# Altium PCB VisitCardPCB.PcbDoc (part 3 of 3)
Units mm, origin at the board's own origin, x right, y up, seen from the top; angles counter-clockwise.
Board outline 85 x 55 mm, 2 copper layers (Top, Bottom); 50 components, 47 nets, 148 pads, 42 vias.
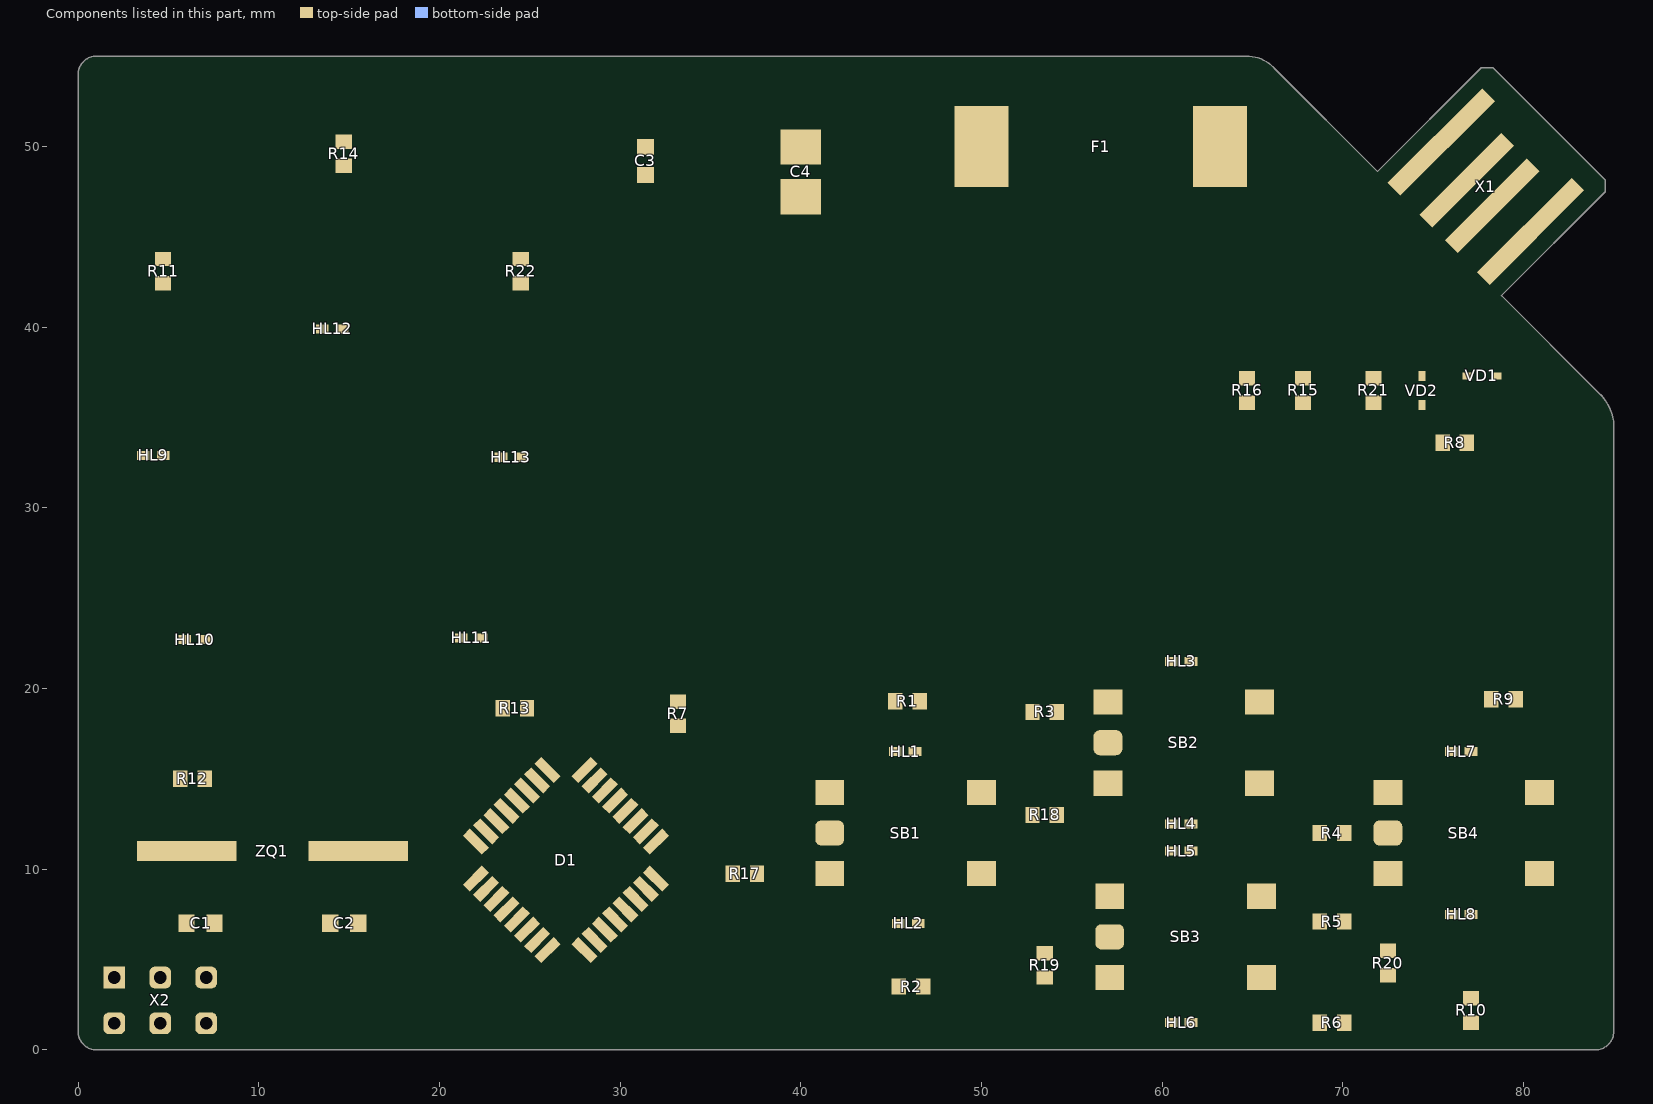
[diagram p3: the components of this part, seen from the top]

## Via types
v1: diameter 1, hole 0.5, Top to Bottom, 41 vias
v2: diameter 3.5/3.5 (per signal layer), hole 2.5, Top to Bottom, 1 vias

## Nets (pads, with @x,y where several pads share a name; then routed paths per layer and width w, separated by ;. In a path a pad name is that pad's centre, name@x,y a point inside that pad or via, vN(x,y) a via of type N, cw(c..) or ccw(c..) an arc to the next point about the centre after c; other vN are vias at no path point) (continued)
copper on no net: (continued)
  Top w0.025: 74.449,31.017 78.081,31.017 ; 74.474,23.092 76.024,23.092 ; 74.474,31.043 78.081,31.043 ; 74.474,31.068 78.081,31.068 ; 74.5,31.093 78.081,31.093 ; 74.5,31.119 78.081,31.119 ; 74.525,23.067 75.998,23.067 ; 74.525,31.144 78.081,31.144 ; 74.525,31.17 78.081,31.17 ; 74.551,31.195 78.081,31.195 ; 74.551,31.22 78.081,31.22 ; 74.576,23.042 75.948,23.042 ; 74.576,31.246 78.081,31.246 ; 74.576,31.271 78.081,31.271 ; 74.601,31.297 78.081,31.297 ; 74.627,31.322 78.081,31.322 ; 74.627,31.347 78.081,31.347 ; 74.652,31.373 78.081,31.373 ; 74.678,23.016 75.846,23.016 ; 74.678,31.398 78.081,31.398 ; 74.703,31.424 78.081,31.424 ; 74.703,31.449 78.081,31.449 ; 74.728,31.474 78.081,31.474 ; 74.754,31.5 78.081,31.5 ; 74.779,31.525 78.081,31.525 ; 74.805,31.551 78.081,31.551 ; 74.83,31.576 78.081,31.576 ; 74.855,31.601 78.081,31.601 ; 74.881,31.627 78.081,31.627 ; 74.906,31.652 78.081,31.652 ; 74.932,31.678 78.081,31.678 ; 74.957,31.703 78.081,31.703 ; 75.008,31.728 78.081,31.728 ; 75.033,31.754 78.081,31.754 ; 75.059,31.779 78.081,31.779 ; 75.109,31.805 78.056,31.805 ; 75.16,31.83 78.056,31.83 ; 75.186,31.855 78.056,31.855 ; 75.236,31.881 78.03,31.881 ; 75.287,31.906 78.03,31.906 ; 75.338,31.932 78.005,31.932 ; 75.414,31.957 77.98,31.957 ; 75.49,31.982 77.954,31.982 ; 75.567,32.008 77.903,32.008 ; 75.694,32.033 77.853,32.033 ; 75.871,32.059 77.751,32.059 ; 78.996,24.566 82.196,24.566 ; 78.996,24.591 82.196,24.591 ; 78.996,24.616 82.171,24.616 ; 78.996,24.642 82.171,24.642 ; 78.996,24.667 82.145,24.667 ; 78.996,24.693 82.145,24.693 ; 78.996,24.718 82.12,24.718 ; 78.996,24.743 82.094,24.743 ; 78.996,24.769 82.069,24.769 ; 78.996,24.794 82.018,24.794 ; 78.996,24.82 81.967,24.82 ; 78.996,24.845 81.84,24.845 ; 78.996,24.87 80.824,24.87 ; 78.996,24.896 80.824,24.896 ; 78.996,24.921 80.824,24.921 ; 78.996,24.947 80.824,24.947 ; 78.996,24.972 80.824,24.972 ; 78.996,24.997 80.824,24.997 ; 78.996,25.023 80.824,25.023 ; 78.996,25.048 80.824,25.048 ; 78.996,25.074 80.824,25.074 ; 78.996,25.099 80.824,25.099 ; 78.996,25.124 80.824,25.124 ; 78.996,25.15 80.824,25.15 ; 78.996,25.175 80.824,25.175 ; 78.996,25.201 80.824,25.201 ; 78.996,25.226 80.824,25.226 ; 78.996,25.251 80.824,25.251 ; 78.996,25.277 80.824,25.277 ; 78.996,25.302 80.824,25.302 ; 78.996,25.328 80.824,25.328 ; 78.996,25.353 80.824,25.353 ; 78.996,25.378 80.824,25.378 ; 78.996,25.404 80.824,25.404 ; 78.996,25.429 80.824,25.429 ; 78.996,25.455 80.824,25.455 ; 78.996,25.48 80.824,25.48 ; 78.996,25.505 80.824,25.505 ; 78.996,25.531 80.824,25.531 ; 78.996,25.556 80.824,25.556 ; 78.996,25.582 80.824,25.582 ; 78.996,25.607 80.824,25.607 ; 78.996,25.632 80.824,25.632 ; 78.996,25.658 80.824,25.658 ; 78.996,25.683 80.824,25.683 ; 78.996,25.709 80.824,25.709 ; 78.996,25.734 80.824,25.734 ; 78.996,25.759 80.824,25.759 ; 78.996,25.785 80.824,25.785 ; 78.996,25.81 80.824,25.81 ; 78.996,25.836 80.824,25.836 ; 78.996,25.861 80.824,25.861 ; 78.996,25.886 80.824,25.886 ; 78.996,25.912 80.824,25.912 ; 78.996,25.937 80.824,25.937 ; 78.996,25.963 80.824,25.963 ; 78.996,25.988 80.824,25.988 ; 78.996,26.013 80.824,26.013 ; 78.996,26.039 80.824,26.039 ; 78.996,26.064 80.824,26.064 ; 78.996,26.09 80.824,26.09 ; 78.996,26.115 80.824,26.115 ; 78.996,26.14 80.824,26.14 ; 78.996,26.166 80.824,26.166 ; 78.996,26.191 80.824,26.191 ; 78.996,26.217 80.824,26.217 ; 78.996,26.242 80.824,26.242 ; 78.996,26.267 80.824,26.267 ; 78.996,26.293 80.824,26.293 ; 78.996,26.318 80.824,26.318 ; 78.996,26.344 80.824,26.344 ; 78.996,26.369 80.824,26.369 ; 78.996,26.394 80.824,26.394 ; 78.996,26.42 80.824,26.42 ; 78.996,26.445 80.824,26.445 ; 78.996,26.471 80.824,26.471 ; 78.996,26.496 80.824,26.496 ; 78.996,26.521 80.824,26.521 ; 78.996,26.547 80.824,26.547 ; 78.996,26.572 80.824,26.572 ; 78.996,26.598 80.824,26.598 ; 78.996,26.623 80.824,26.623 ; 78.996,26.648 80.824,26.648 ; 78.996,26.674 80.824,26.674 ; 78.996,26.699 80.824,26.699 ; 78.996,26.725 80.824,26.725 ; 78.996,26.75 80.824,26.75 ; 78.996,26.775 80.824,26.775 ; 78.996,26.801 80.824,26.801 ; 78.996,26.826 80.824,26.826 ; 78.996,26.852 80.824,26.852 ; 78.996,26.877 80.824,26.877 ; 78.996,26.902 80.824,26.902 ; 78.996,26.928 80.824,26.928 ; 78.996,26.953 80.824,26.953 ; 78.996,26.979 80.824,26.979 ; 78.996,27.004 80.824,27.004 ; 78.996,27.029 80.824,27.029 ; 78.996,27.055 80.824,27.055 ; 78.996,27.08 80.824,27.08 ; 78.996,27.106 80.824,27.106 ; 78.996,27.131 80.824,27.131 ; 78.996,27.156 81.764,27.156 ; 78.996,27.182 81.84,27.182 ; 78.996,27.207 81.866,27.207 ; 78.996,27.233 81.917,27.233 ; 78.996,27.258 81.942,27.258 ; 78.996,27.283 81.967,27.283 ; 78.996,27.309 81.967,27.309 ; 78.996,27.334 81.993,27.334 ; 78.996,27.36 82.018,27.36 ; 78.996,27.385 82.018,27.385 ; 78.996,27.41 82.018,27.41 ; 78.996,27.436 82.044,27.436 ; 78.996,27.461 82.044,27.461 ; 78.996,27.487 82.044,27.487 ; 78.996,27.512 82.044,27.512 ; 78.996,27.537 82.044,27.537 ; 78.996,27.563 82.044,27.563 ; 78.996,27.588 82.044,27.588 ; 78.996,27.614 82.044,27.614 ; 78.996,27.639 82.044,27.639 ; 78.996,27.664 82.044,27.664 ; 78.996,27.69 82.044,27.69 ; 78.996,27.715 82.044,27.715 ; 78.996,27.741 82.044,27.741 ; 78.996,27.766 82.044,27.766 ; 78.996,27.791 82.044,27.791 ; 78.996,27.817 82.044,27.817 ; 78.996,27.842 82.044,27.842 ; 78.996,27.868 82.044,27.868 ; 78.996,27.893 82.044,27.893 ; 78.996,27.918 82.044,27.918 ; 78.996,27.944 82.044,27.944 ; 78.996,27.969 82.044,27.969 ; 78.996,27.995 82.044,27.995 ; 78.996,28.02 82.044,28.02 ; 78.996,28.045 82.044,28.045 ; 78.996,28.071 82.044,28.071 ; 78.996,28.096 82.044,28.096 ; 78.996,28.122 82.044,28.122 ; 78.996,28.147 82.044,28.147 ; 78.996,28.172 82.044,28.172 ; 78.996,28.198 82.044,28.198 ; 78.996,28.223 82.044,28.223 ; 78.996,28.249 82.044,28.249 ; 78.996,28.274 82.044,28.274 ; 78.996,28.299 82.044,28.299 ; 78.996,28.325 82.044,28.325 ; 78.996,28.35 82.044,28.35 ; 78.996,28.376 82.044,28.376 ; 78.996,28.401 82.044,28.401 ; 78.996,28.426 82.044,28.426 ; 78.996,28.452 82.044,28.452 ; 78.996,28.477 82.044,28.477 ; 78.996,28.503 82.044,28.503 ; 78.996,28.528 82.044,28.528 ; 78.996,28.553 82.044,28.553 ; 78.996,28.579 82.044,28.579 ; 78.996,28.604 82.044,28.604 ; 78.996,28.63 82.044,28.63 ; 78.996,28.655 82.044,28.655 ; 78.996,28.68 82.044,28.68 ; 78.996,28.706 82.018,28.706 ; 78.996,28.731 82.018,28.731 ; 78.996,28.757 82.018,28.757 ; 78.996,28.782 81.993,28.782 ; 78.996,28.807 81.993,28.807 ; 78.996,28.833 81.967,28.833 ; 78.996,28.858 81.942,28.858 ; 78.996,28.884 81.917,28.884 ; 78.996,28.909 81.891,28.909 ; 78.996,28.934 81.84,28.934 ; 78.996,28.96 81.764,28.96 ; 78.996,28.985 80.824,28.985 ; 78.996,29.011 80.824,29.011 ; 78.996,29.036 80.824,29.036 ; 78.996,29.061 80.824,29.061 ; 78.996,29.087 80.824,29.087 ; 78.996,29.112 80.824,29.112 ; 78.996,29.138 80.824,29.138 ; 78.996,29.163 80.824,29.163 ; 78.996,29.188 80.824,29.188 ; 78.996,29.214 80.824,29.214 ; 78.996,29.239 80.824,29.239 ; 78.996,29.265 80.824,29.265 ; 78.996,29.29 80.824,29.29 ; 78.996,29.315 80.824,29.315 ; 78.996,29.341 80.824,29.341 ; 78.996,29.366 80.824,29.366 ; 78.996,29.392 80.824,29.392 ; 78.996,29.417 80.824,29.417 ; 78.996,29.442 80.824,29.442 ; 78.996,29.468 80.824,29.468 ; 78.996,29.493 80.824,29.493 ; 78.996,29.519 80.824,29.519 ; 78.996,29.544 80.824,29.544 ; 78.996,29.569 80.824,29.569 ; 78.996,29.595 80.824,29.595 ; 78.996,29.62 80.824,29.62 ; 78.996,29.646 80.824,29.646 ; 78.996,29.671 80.824,29.671 ; 78.996,29.696 80.824,29.696 ; 78.996,29.722 80.824,29.722 ; 78.996,29.747 80.824,29.747 ; 78.996,29.773 80.824,29.773 ; 78.996,29.798 80.824,29.798 ; 78.996,29.823 80.824,29.823 ; 78.996,29.849 80.824,29.849 ; 78.996,29.874 80.824,29.874 ; 78.996,29.9 80.824,29.9 ; 78.996,29.925 80.824,29.925 ; 78.996,29.95 80.824,29.95 ; 78.996,29.976 80.824,29.976 ; 78.996,30.001 80.824,30.001 ; 78.996,30.027 80.824,30.027 ; 78.996,30.052 80.824,30.052 ; 78.996,30.077 80.824,30.077 ; 78.996,30.103 80.824,30.103 ; 78.996,30.128 80.824,30.128 ; 78.996,30.154 80.824,30.154 ; 78.996,30.179 80.824,30.179 ; 78.996,30.204 80.824,30.204 ; 78.996,30.23 80.824,30.23 ; 78.996,30.255 80.824,30.255 ; 78.996,30.281 80.824,30.281 ; 78.996,30.306 80.824,30.306 ; 78.996,30.331 80.824,30.331 ; 78.996,30.357 80.824,30.357 ; 78.996,30.382 80.824,30.382 ; 78.996,30.408 80.824,30.408 ; 78.996,30.433 80.824,30.433 ; 78.996,30.458 80.824,30.458 ; 78.996,30.484 80.824,30.484 ; 78.996,30.509 80.824,30.509 ; 78.996,30.535 80.824,30.535 ; 78.996,30.56 80.824,30.56 ; 79.021,24.362 82.196,24.362 ; 79.021,24.388 82.196,24.388 ; 79.021,24.413 82.196,24.413 ; 79.021,24.439 82.196,24.439 ; 79.021,24.464 82.196,24.464 ; 79.021,24.489 82.196,24.489 ; 79.021,24.515 82.196,24.515 ; 79.021,24.54 82.196,24.54 ; 79.021,30.585 80.824,30.585 ; 79.021,30.611 80.824,30.611 ; 79.021,30.636 80.824,30.636 ; 79.021,30.662 80.824,30.662 ; 79.021,30.687 80.799,30.687 ; 79.046,24.261 82.196,24.261 ; 79.046,24.286 82.196,24.286 ; 79.046,24.312 82.196,24.312 ; 79.046,24.337 82.196,24.337 ; 79.046,30.712 80.799,30.712 ; 79.072,24.185 82.196,24.185 ; 79.072,24.21 82.196,24.21 ; 79.072,24.235 82.196,24.235 ; 79.072,30.738 80.774,30.738 ; 79.072,30.763 80.748,30.763 ; 79.097,24.108 82.196,24.108 ; 79.097,24.134 82.196,24.134 ; 79.097,24.159 82.196,24.159 ; 79.097,30.789 80.748,30.789 ; 79.123,24.032 82.196,24.032 ; 79.123,24.058 82.196,24.058 ; 79.123,24.083 82.196,24.083 ; 79.123,30.814 80.723,30.814 ; 79.148,23.981 82.196,23.981 ; 79.148,24.007 82.196,24.007 ; 79.148,30.839 80.672,30.839 ; 79.173,23.931 82.196,23.931 ; 79.173,23.956 82.196,23.956 ; 79.199,23.88 82.196,23.88 ; 79.199,23.905 82.196,23.905 ; 79.199,30.865 80.647,30.865 ; 79.224,23.829 82.196,23.829 ; 79.224,23.854 82.196,23.854 ; 79.25,23.804 82.196,23.804 ; 79.25,30.89 80.57,30.89 ; 79.275,23.753 82.196,23.753 ; 79.275,23.778 82.196,23.778 ; 79.3,23.727 82.196,23.727 ; 79.326,23.702 82.196,23.702 ; 79.351,23.651 82.196,23.651 ; 79.351,23.677 82.196,23.677 ; 79.377,23.626 82.196,23.626 ; 79.402,23.6 82.196,23.6 ; 79.427,23.575 82.196,23.575 ; 79.453,23.55 82.196,23.55 ; 79.478,23.524 82.196,23.524 ; 79.504,23.499 82.196,23.499 ; 79.529,23.473 82.196,23.473 ; 79.554,23.448 82.196,23.448 ; 79.58,23.423 82.196,23.423 ; 79.605,23.397 82.196,23.397 ; 79.631,23.372 82.196,23.372 ; 79.681,23.346 82.196,23.346 ; 79.707,23.321 82.196,23.321 ; 79.732,23.296 82.196,23.296 ; 79.783,23.27 82.196,23.27 ; 79.834,23.245 82.171,23.245 ; 79.859,23.219 82.171,23.219 ; 79.91,23.194 82.145,23.194 ; 79.961,23.169 82.145,23.169 ; 80.037,23.143 82.12,23.143 ; 80.088,23.118 82.094,23.118 ; 80.164,23.092 82.069,23.092 ; 80.266,23.067 82.018,23.067 ; 80.367,23.042 81.967,23.042
  other v2: 4,51

## Polygon pours and split planes (outlines as drawn)
GND on Bottom "BottomGND" (solid, remove dead copper, pour order 12): 0.5,5 8,5 8,2.5 6,2.5 6,0.5 84.5,0.5 84.5,35 65,54.5 0.5,54.5
GND on Top "TopGND" (solid, remove dead copper, pour order 8): 0.5,5 8,5 8,0.5 28,0.5 28,4 21,11 27,17 34,10 28,4 28,0.5 84.5,0.5 84.5,35 65,54.5 0.5,54.5

## Silkscreen, mask and mechanical layers (free items; w line width, h text height)
Top Overlay:
  drawing of 4949 lines, arcs and shapes, not listed
  text "plug me" at 70.6,45.9 h3 r315
  text "www.rmcsoft.com" at 29.9,41 h5
  text "(980) 201-2460" at 33.2,35.7 h5
Bottom Overlay:
  drawing of 1494 lines, arcs and shapes, not listed
  text "Instructions:" at 37,45 h5
  text "1. Scan QR code and / open it in your browser. / 2. Insert card into USB / port. / 3. Solve the quest. / 4. Get rewarded." at 49,13 h5
Board:
  lines w0.05: 64.834,54.999 cw(c64.69,52.93) 66.263,54.282 66.268,54.282 71.93,48.62 ; 64.834,55 1,55 ccw(c1,54) 0,54 0,1 ccw(c1,1) 1,0 83.99,0 ; 84,0 ccw(c84,1) 85,1 85,34.801 ; 85.003,34.801 ccw(c82.216,34.326) 84.176,36.364 78.79,41.75 78.78,41.75 84.53,47.5 84.53,48.15 78.32,54.36 77.67,54.36 71.93,48.62 ; 71.93,48.62 71.93,48.62 ; 71.93,48.62 71.93,48.62

## Dimensions
0,0 to 0,55 on Plata
0,0 to 85,0 on Plata

## Text inside footprints (layer, text, board x,y; h text height)
C4: Top Overlay "+" at 41.6,50.9 h1.5 r270
HL1: Top Overlay "+" at 46.725,15.9 h0.5 r180
HL2: Top Overlay "+" at 47,6.375 h0.5 r180
HL3: Top Overlay "+" at 60.1,22.1 h0.5
HL4: Top Overlay "+" at 60,13.125 h0.5
HL5: Top Overlay "+" at 60.1,11.6 h0.5
HL6: Top Overlay "+" at 60,2.125 h0.5
HL7: Top Overlay "+" at 75.6,17.1 h0.5
HL8: Top Overlay "+" at 75.5,8.125 h0.5
HL9: Top Overlay "+" at 3.2,33.5 h0.5
HL10: Top Overlay "+" at 5.4,23.325 h0.5
HL11: Top Overlay "+" at 20.7,23.425 h0.5
HL12: Top Overlay "+" at 13,40.525 h0.5
HL13: Top Overlay "+" at 22.9,33.425 h0.5